# Altium PCB Aux_HV_Board_PCB.PcbDoc
Units mil, origin at the board's own origin, x right, y up, seen from the top; angles counter-clockwise.
Board outline 5000 x 6000 mil, 4 copper layers (Top Layer, Mid-Layer 1, Mid-Layer 2, Bottom Layer), stack 40.247 mil thick; 29 components, 19 nets, 305 pads, 13 vias.
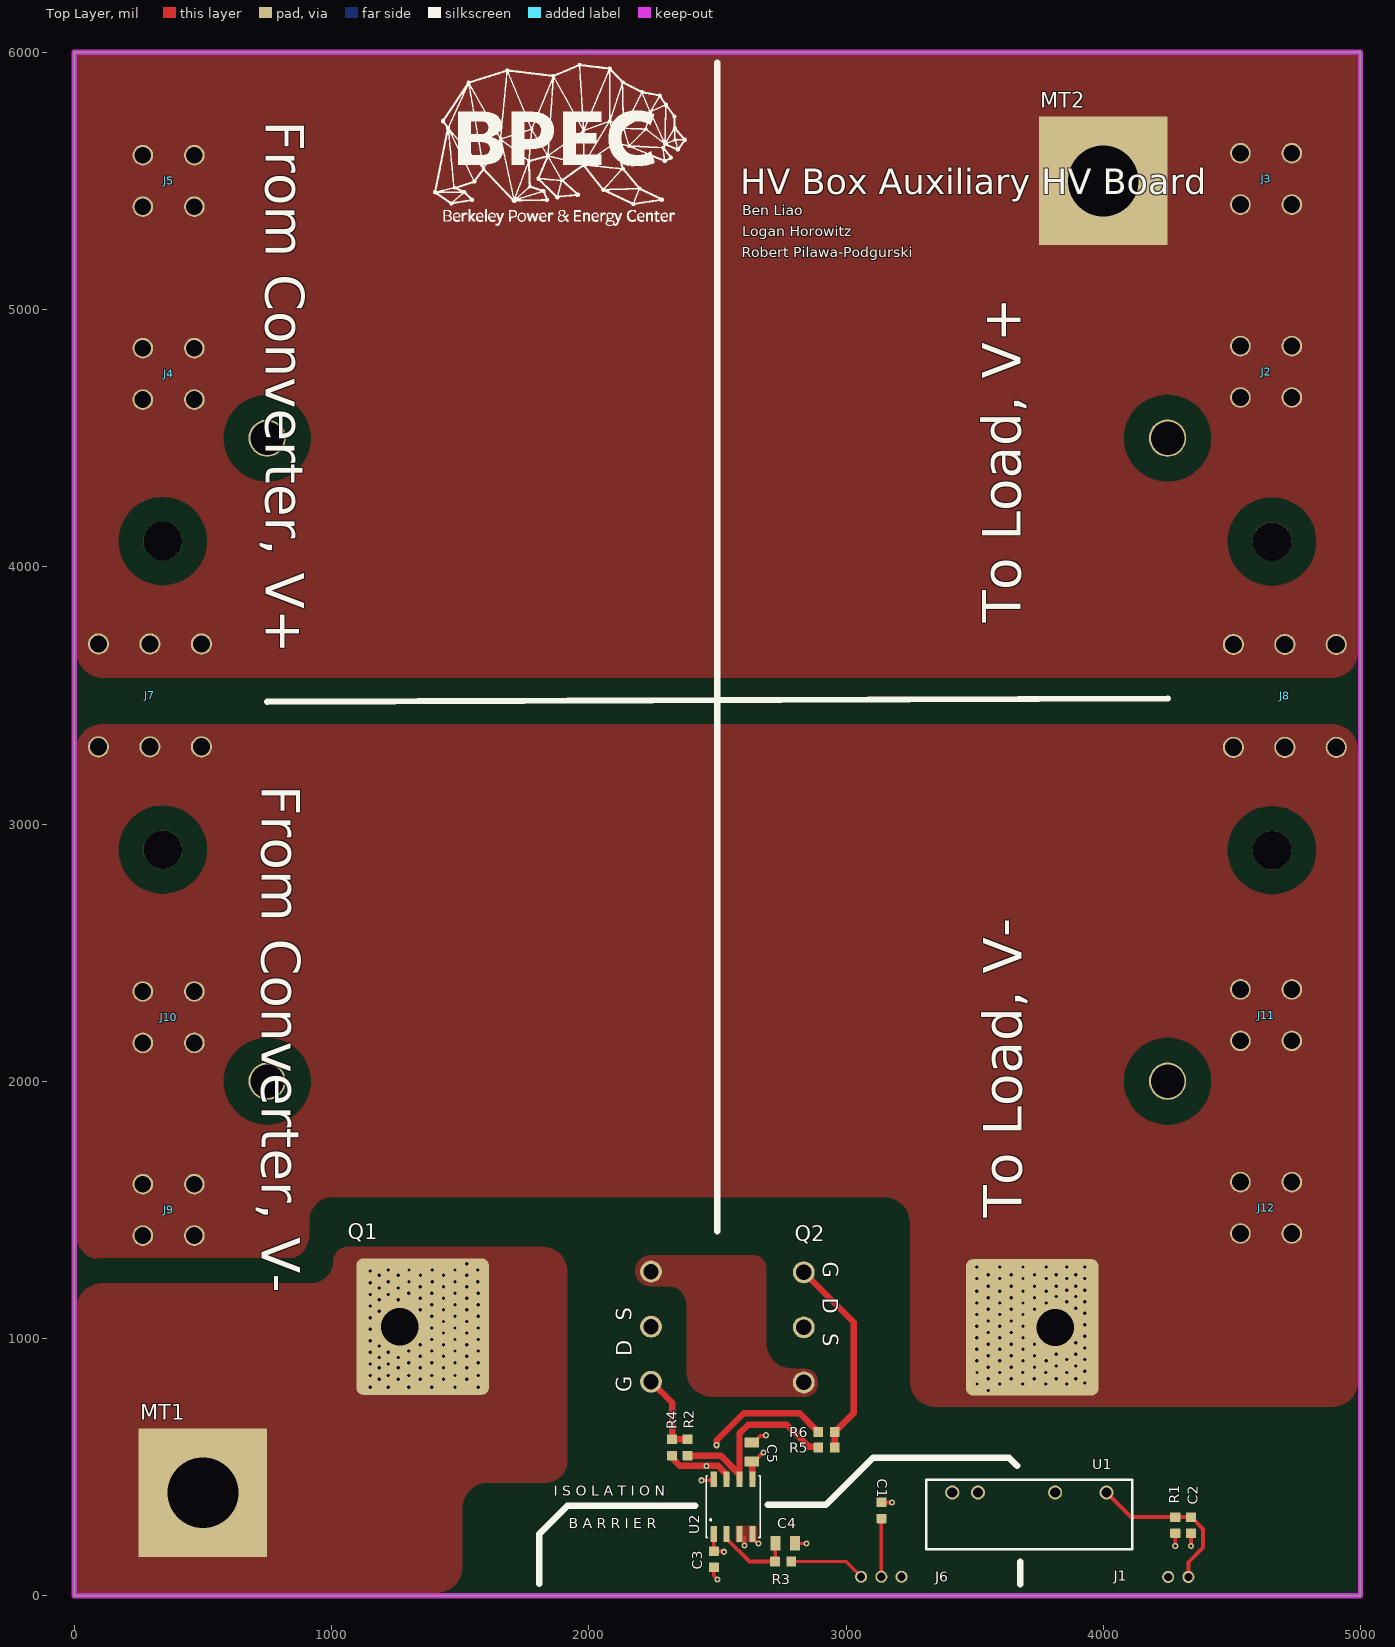
[diagram p0: Top Layer view]
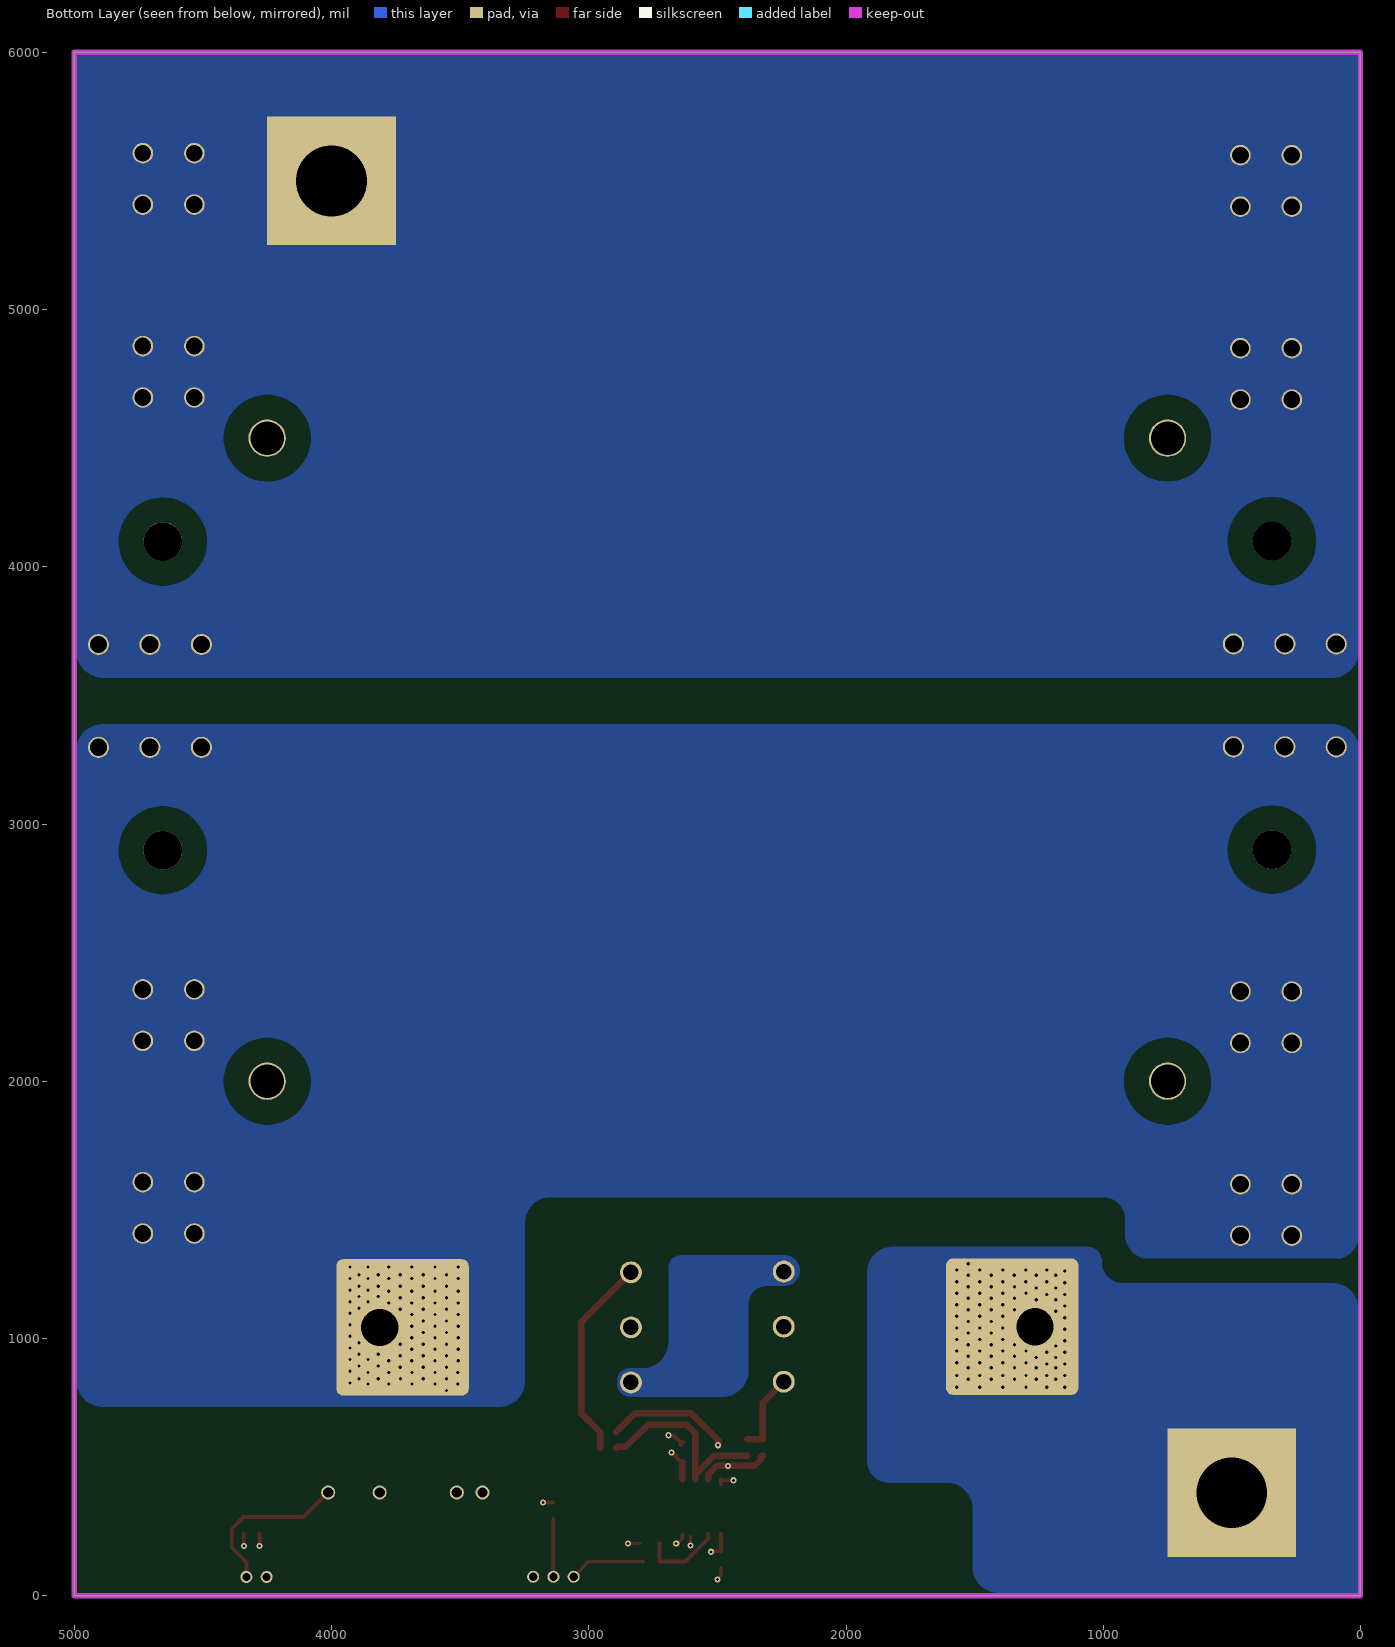
[diagram p1: Bottom Layer view, seen from below]
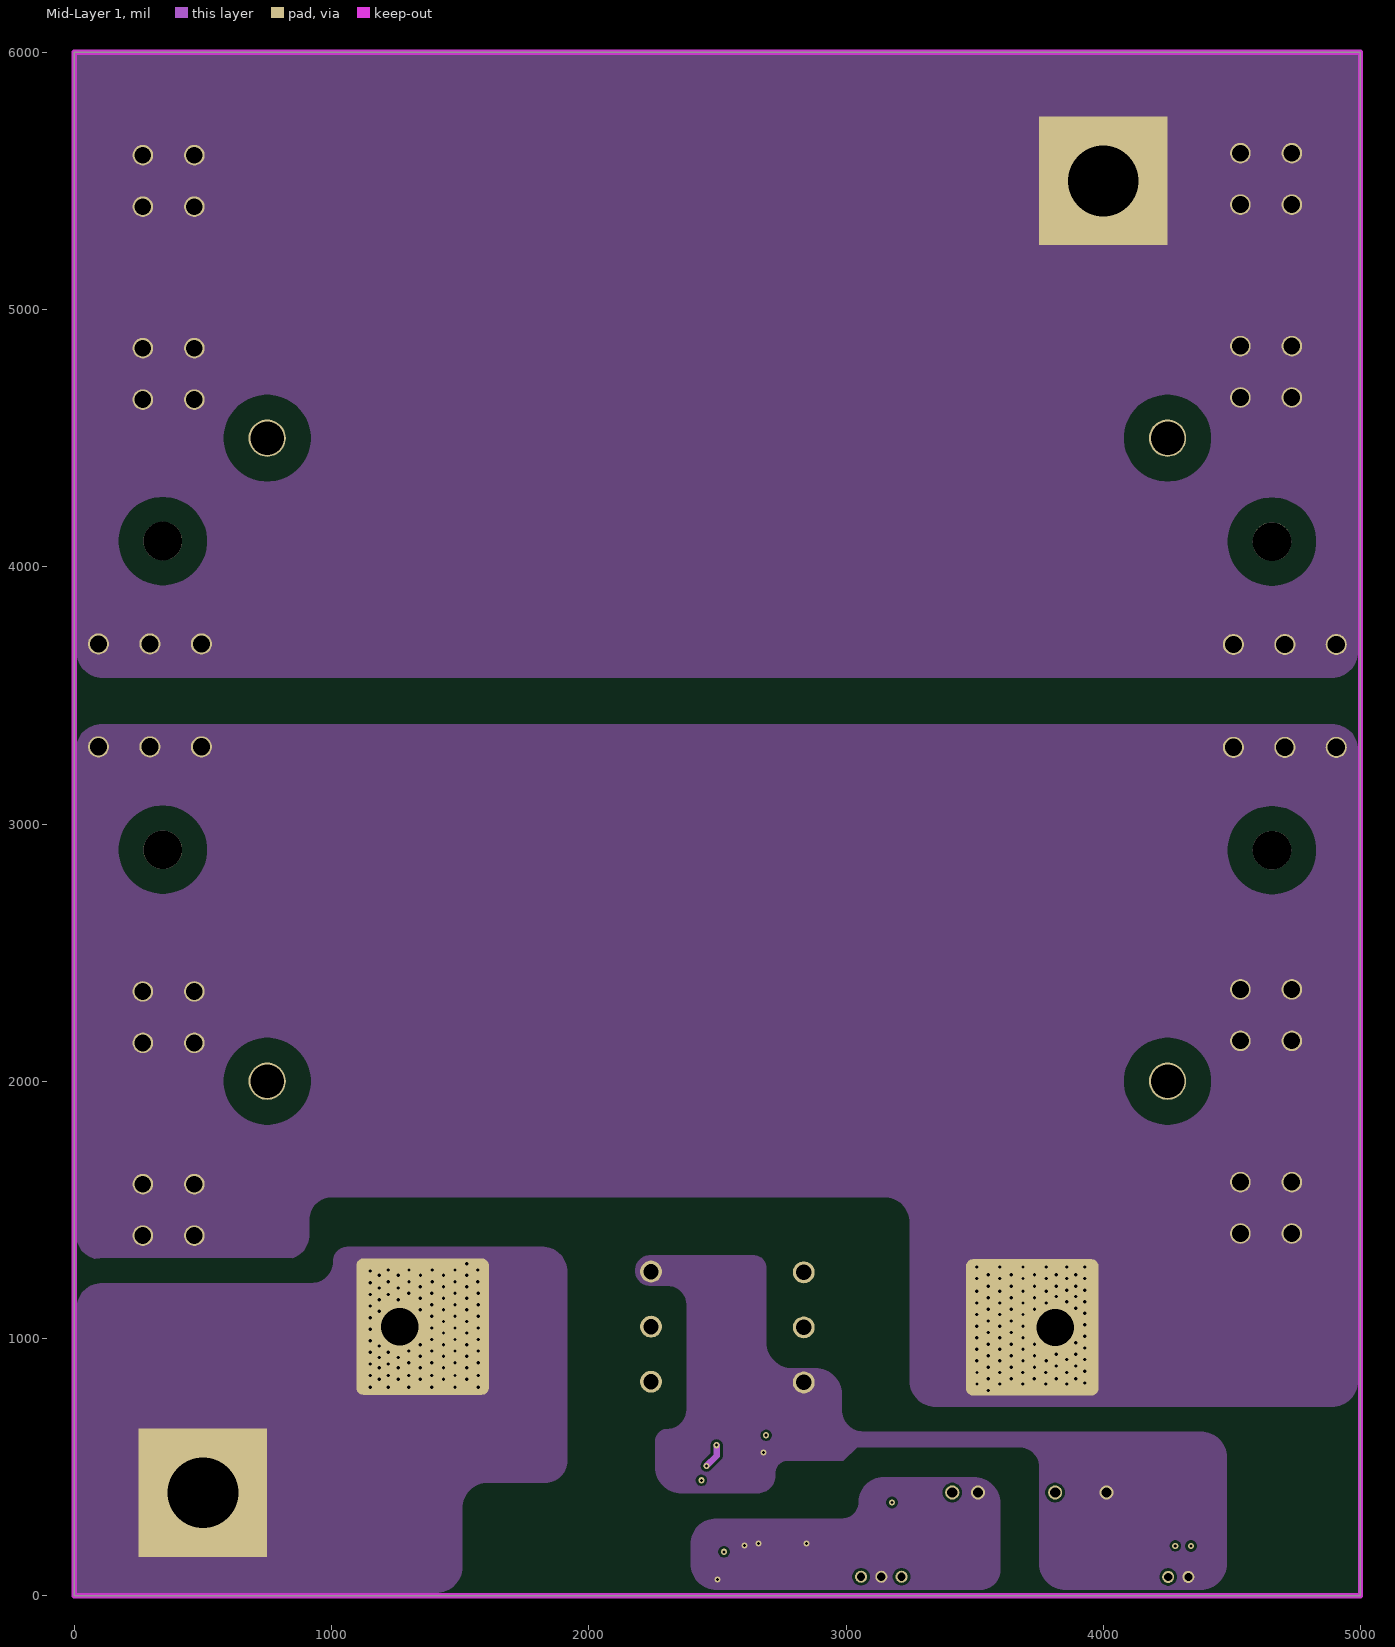
[diagram p2: Mid-Layer 1]
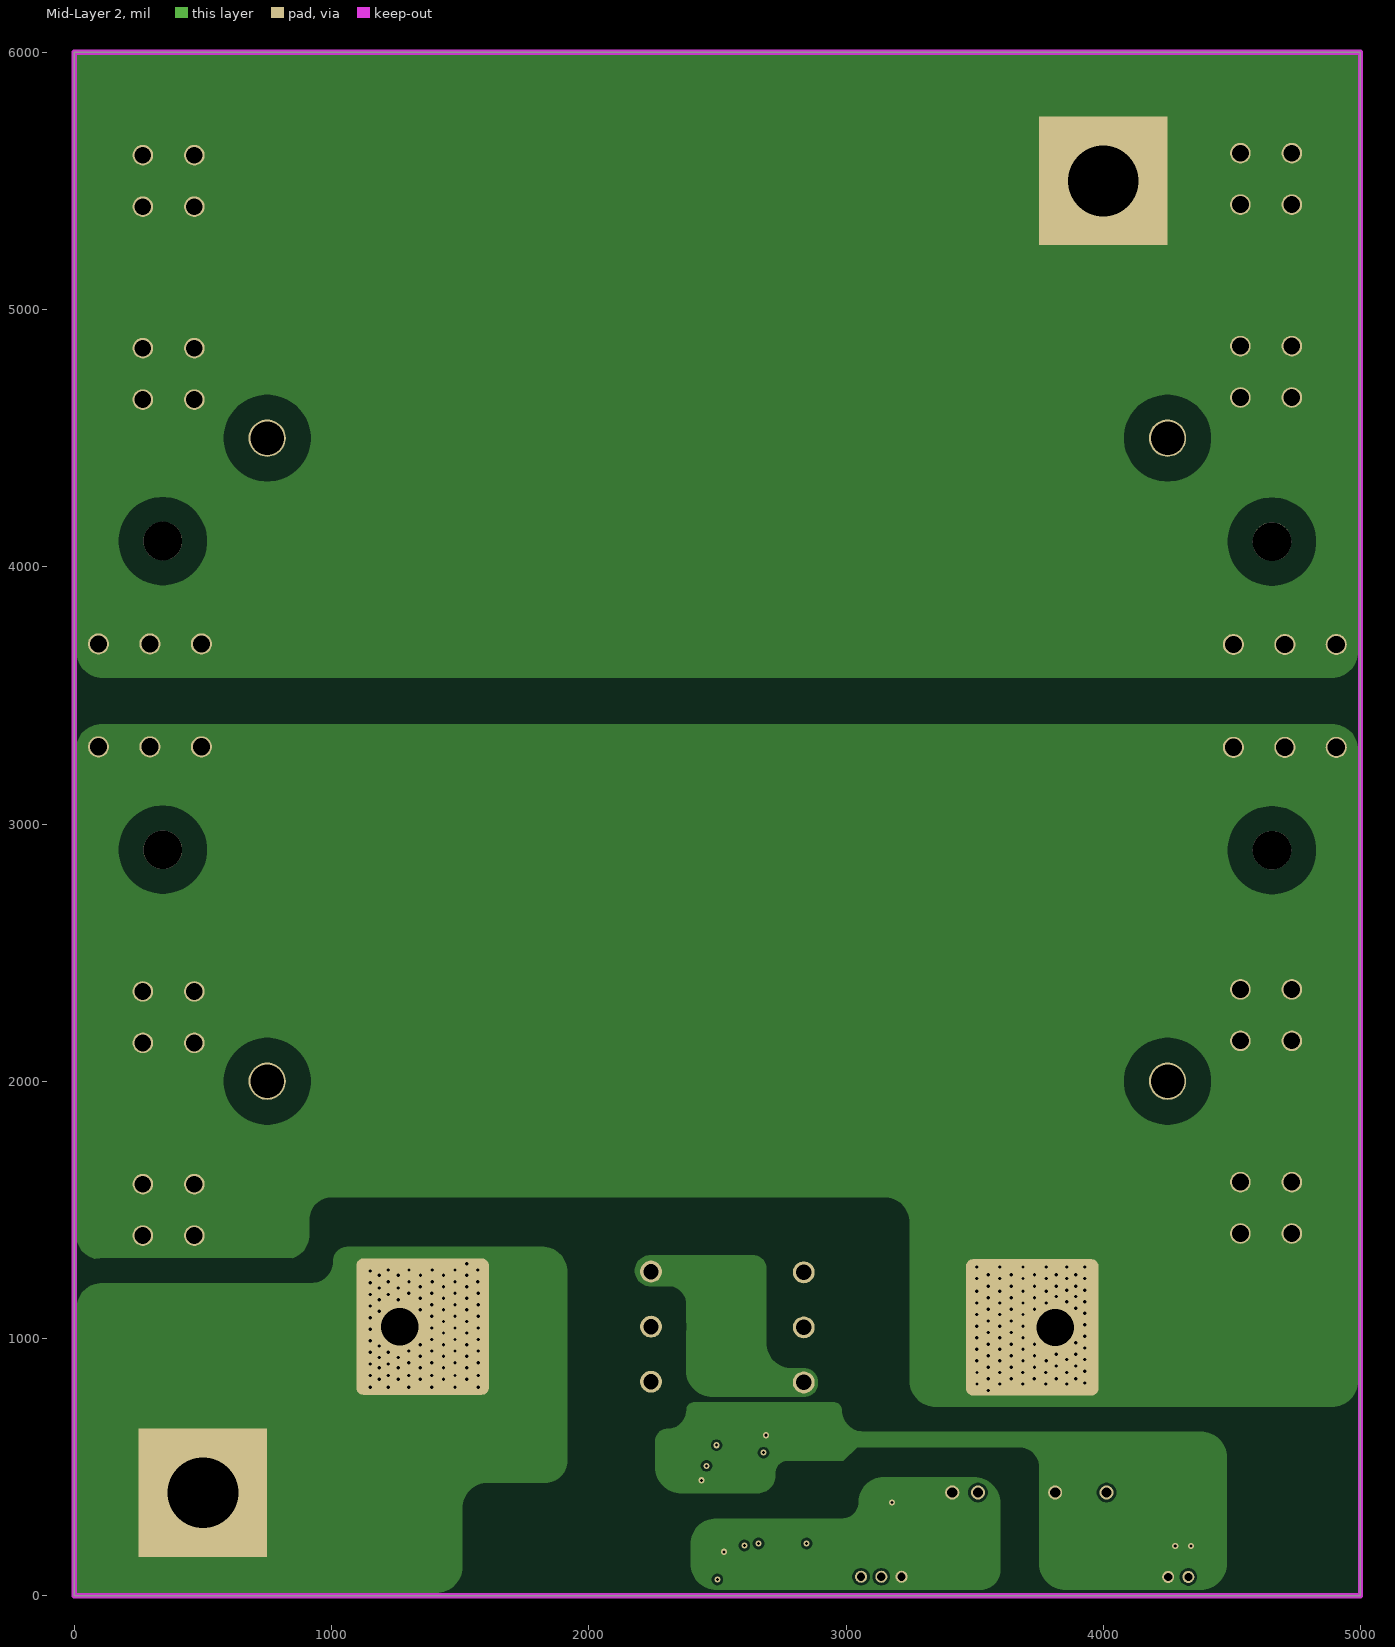
[diagram p3: Mid-Layer 2]
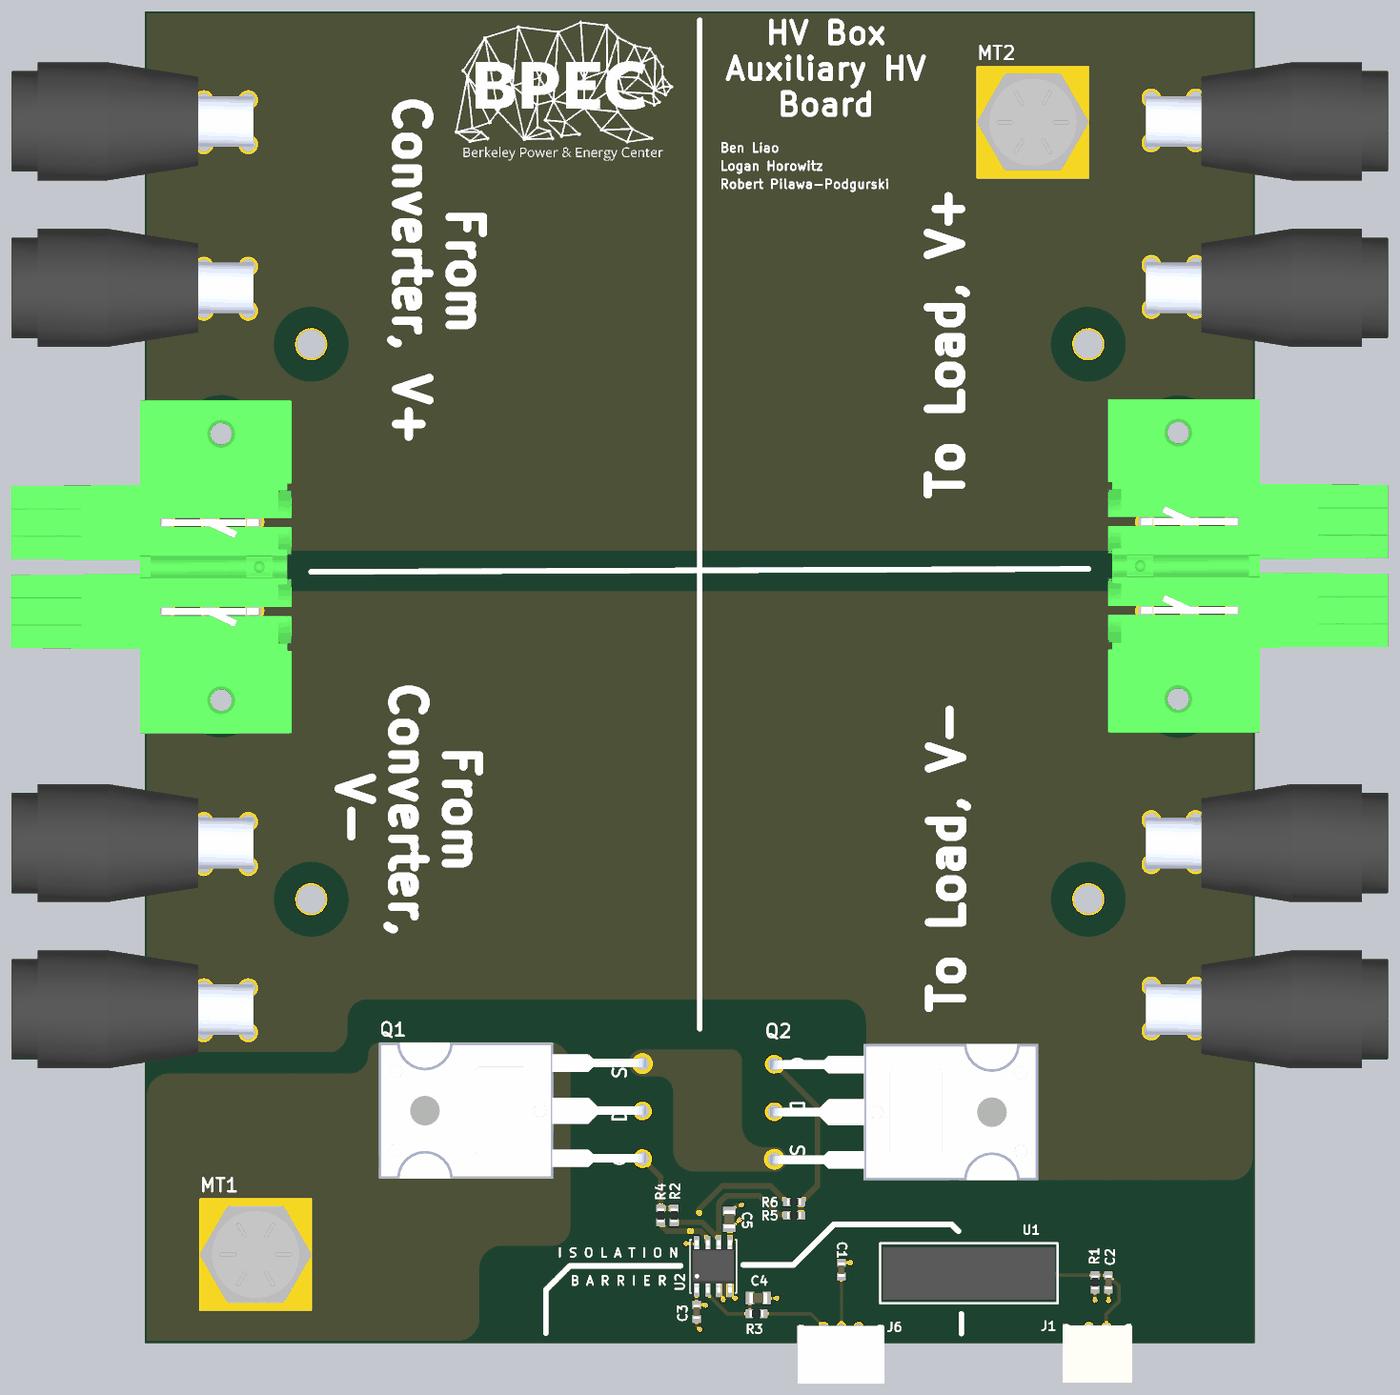
[diagram p4: 3D render of the assembled board from above, using the file's embedded part models]

## Layer stack, top to bottom
Top Solder: solder mask 0.4, Solder Resist, Dk 3.5
Top Layer: signal copper 5.5118
Dielectric 1: dielectric 2.8, FR-4, Dk 4.8
Mid-Layer 1: signal copper 5.5118
Dielectric2: dielectric 12.6, FR-4, Dk 4.8
Mid-Layer 2: signal copper 5.5118
Dielectric3: dielectric 2.8, FR-4, Dk 4.8
Bottom Layer: signal copper 5.5118
Bottom Solder: solder mask 0.4, Solder Resist, Dk 3.5

## Board outline
0,0 5000,0 5000,6000 0,6000

## Design rules (kind name [scope] priority, off if disabled: settings)
BoardOutlineClearance [All] p1: gap=9.84 ignorepadtopadclearanceinfootprint=FALSE
Clearance Clearance_1 [InNetClass('High Voltage') vs OnLayer('Multi-Layer')] p1: gap=96 ignorepadtopadclearanceinfootprint=FALSE
Clearance Clearance_HV [InNetClass('High Voltage') vs InNetClass('High Voltage')] p2: gap=96 ignorepadtopadclearanceinfootprint=FALSE
Clearance Clearance_HV_TO_LV [InNetClass('High Voltage') vs InNetClass('Low Voltage')] p3: gap=96 ignorepadtopadclearanceinfootprint=TRUE
Clearance Clearance_HV_TO_ISO [InNetClass('High Voltage') vs InNetClass('Isolated')] p4: gap=96 ignorepadtopadclearanceinfootprint=TRUE
Clearance Clearance_ISO_TO_LV [InNetClass('Isolated') vs InNetClass('Low Voltage')] p5: gap=96 ignorepadtopadclearanceinfootprint=TRUE
Clearance Clearance_Edge [OnLayer('Keep-Out Layer')] p6: gap=0 ignorepadtopadclearanceinfootprint=FALSE
Clearance [All] p7: gap=10 ignorepadtopadclearanceinfootprint=FALSE except(0: Arc-Hole Track-Hole SMDPad-Hole THPad-Hole Via-Hole Fill-Hole Poly-Hole Region-Hole Text-Hole; 5: Arc-Arc Arc-Track Arc-SMDPad Track-Track Track-SMDPad SMDPad-SMDPad; 5.98: SMDPad-Fill SMDPad-Poly SMDPad-Region; 7.87: Via-Via)
ComponentClearance [All] p1: gap=3.94 collisioncheckmode=3 verticalgap=3.94 showdistances=FALSE
Height [All] p1: minheight=0 maxheight=3000 prefheight=500
HoleSize [All] p1: absolutevalues=TRUE maxlimit=1000 minlimit=7.87 maxpercent=80.000 minpercent=20.000
HoleToHoleClearance [All] p1: gap=19.68 allowstackedmicrovias=TRUE
MinimumAnnularRing [All] p1: minimumring=5.12
MinimumSolderMaskSliver [All] p1 off: minsoldermaskwidth=7.87
PlaneConnect [All] p1: planeconnectstyle=Direct reliefexpansion=20 reliefentries=4 reliefconductorwidth=10 reliefairgap=10
PolygonConnect [All] p1: connectstyle=Direct reliefconductorwidth=39.37 reliefentries=4 polygonreliefangle="90 Angle" airgapwidth=9.84
RoutingVias [All] p1: holewidth=11.81 width=23.62 viastyle="Through Hole" minholewidth=11.81 minwidth=23.62 maxholewidth=248.03 maxwidth=393.7
SolderMaskExpansion [All] p1: expansion=4 istentingtop=FALSE
Width [All] p1: maxlimit=393.7 minlimit=13 preferedwidth=15 minimp=50.000000 maximp=50.000000 favimp=50.000000
24 further rules are at their usual default settings.

## Classes and differential pairs
net class "Low Voltage": +12 GND NetC4_2 PHX1_MT1 PHX1_MT2 PHX2_MT1 PHX2_MT2 V_RES_OUT
net class Isolated: ISO_GND JFET_SOURCE NetQ1_1 NetQ2_1 NetR2_1 NetR4_1
net class "High Voltage": NetMT1_1 Q1_D_Pin Q2_D_Pin RAIL1 RAIL2

## Components (designator, comment, footprint, x,y, rotation, side; value= is the part's Value field where it differs from the comment)
C1 "2.2uF" 0603_CAP 3138,300 r90 top
C2 "2.2uF" 0603_CAP 4341,242.75 r90 top
C3 "100nF" 0603_CAP 2486,109.75 r90 top
C4 "47nF,0805" 0805_CAP 2801,204 r180 top
C5 "10uF" 0805_CAP 2633,596 r270 top
J1 "JST2" JST_2 4331,73 r180 top
J2 "Banana" BANANA_PLUG 4733.35,4858 r180 top
J3 "Banana" BANANA_PLUG 4733.35,5608 r180 top
J4 "Banana" BANANA_PLUG 266.65,4650 r0 top
J5 "Banana" BANANA_PLUG 266.65,5400 r0 top
J6 "JST3" JST_3 3216,73.7 r180 top
J7 "J_Phoenix_76A" PHOENIX_CONNECTOR_76A 294,3500 r270 top
J8 "J_Phoenix_76A" PHOENIX_CONNECTOR_76A 4706,3498 r90 top
J9 "Banana" BANANA_PLUG 266.65,1400 r0 top
J10 "Banana" BANANA_PLUG 266.65,2149 r0 top
J11 "Banana" BANANA_PLUG 4733.35,2357 r180 top
J12 "Banana" BANANA_PLUG 4733.35,1608 r180 top
MT1 "Screw" MOUNT_SMALL 500,400 r0 top
MT2 "Screw" MOUNT_SMALL 4000,5500 r0 top
Q1 "JFET" TO247 2242,832 r90 top
Q2 "JFET" TO247 2836,1257 r270 top
R1 "3.3k" 0603_RES 4280,242.75 r90 top
R2 "51" 0603_RES 2384,544.75 r90 top
R3 "10k" 0603_RES 2787,133 r180 top
R4 "51" 0603_RES 2324,544.75 r90 top
R5 "51" 0603_RES 2893,576 r0 top
R6 "51" 0603_RES 2893,636 r0 top
U1 "U_Power_Isolator" SIP7 3713,401 r180 top
U2 "U_Isolated_Gate_Drive" GATE_DRIVER 2561,346.25 r90 top

## Footprints (in the part's own frame and the unit in brackets; to place one, negate y for a bottom-side part, rotate by r counter-clockwise, add the part's x,y. Pads: shape width x height; smd on the part's side, far side on the other; paste and mask are expansions set on the pad)
0603_CAP [mil] "SMD 0603 Capacitor Footprint"
  rrect10% 37x39 smd: 1(0,0) 2(63,0)
  body extent 0,-15 63,16, height 32
0603_RES [mil] "SMD 0603 Resistor Footprint"
  rrect10% 37x39 smd: 1(0,0) 2(63,0)
  body extent 0,-16 63,16, height 18
0805_CAP [mil] "SMD 0805 Capacitor Footprint"
  rrect10% 39x57 smd: 1(0,0) 2(75,0)
  body extent -2,-25 77,25, height 49
BANANA_PLUG [mil] "Banana Plug Footprint"
  round 80 hole 65: 1(0,200) 1(0,0) 1(200,200) 1(200,0)
  body extent -867,-162 224,370, height 564
GATE_DRIVER [mil] "Isolated Gate Driver Footprint 8-SOIC"
  rrect10% 61x24 smd: 1(-106.5,75) 2(-106.5,25) 3(-106.5,-25) 4(-106.5,-75) 5(106.5,-75) 6(106.5,-25) 7(106.5,25) 8(106.5,75)
  silkscreen extent -120,-105 120,105, body extent -118,-97 118,97, height 69
JST_2 [mil] "2-pin JST Header Footprint, PH series"
  round 47 hole 32: 1(0,0) 2(78.7,0)
  body extent -116,-14 197,252, height 197
JST_3 [mil] "3-pin JST Header Footprint, PH series"
  round 47 hole 32: 1(0,0) 2(78.7,0) 3(157.4,0)
  body extent -115,-10 277,256, height 197
MOUNT_SMALL [mil] "M6/M5 Screw Mount Footprint"
  rect 500x500 hole 275 paste-99999: 1(0,0)
  body extent -251,-219 251,219, height 174
PHOENIX_CONNECTOR_76A [mil] "Jack Phoenix Connector  76 A rated per position 1 kV 2x1 Footprint"
  round 82 hole 67: 1(-200,200) 1(-200,0) 1(-200,-200) 2(200,200) 2(200,0) 2(200,-200)
  round 150 hole 150: 3(-600,50) 4(600,50)
  body extent -746,-894 753,368, height 535
SIP7 [mil] "12 V - 12 V Isolated DC-DC Converter Footprint SIP 7 4 leads"
  round 55 hole 40: 1(-300,0) 3(-100,0) 6(200,0) 7(300,0)
  silkscreen extent -399,-49 401,221, body extent -387,-31 387,205, height 400
TO247 [mil] "TO247 High Power FET Footprint"
  round 85 hole 60: 1(0,0) 2(214,0) 3(428,0)
  round 25 hole 13 paste-99999 mask+4: 4(-21,1092) 4(-21,1022) 4(-21,942) 4(-21,852) 4(-21,762) 4(-21,672) 4(9,1057) 4(9,982) 4(9,897) 4(9,807) 4(9,717) 4(24,1092) 4(24,1022) 4(24,942) 4(24,852) 4(24,762) 4(24,672) 4(54,1057) 4(54,897) 4(54,982) 4(54,807) 4(54,717) 4(69,1092) 4(69,1022) 4(74,852) 4(74,942) 4(74,672) 4(74,762) 4(94,1057) 4(94,982) 4(99,897) 4(99,717) 4(99,807) 4(114,1092) 4(114,1022) 4(119,852) 4(119,942) 4(119,672) 4(119,762) 4(139,1057) 4(144,717) 4(144,807) 4(144,897) 4(159,1092) 4(164,762) 4(164,852) 4(164,672) 4(189,717) 4(189,807) 4(204,1092) 4(209,762) 4(209,852) 4(209,672) 4(234,717) 4(234,807) 4(249,1092) 4(254,762) 4(254,852) 4(254,672) 4(274,1057) 4(279,717) 4(279,807) 4(279,897) 4(294,1092) 4(299,672) 4(299,762) 4(299,852) 4(319,982) 4(319,1057) 4(324,717) 4(324,807) 4(324,897) 4(339,1022) 4(339,1092) 4(344,672) 4(344,762) 4(344,852) 4(344,942) 4(364,982) 4(364,1057) 4(369,717) 4(369,807) 4(369,897) 4(385,1092) 4(389,673) 4(389,762) 4(389,851) 4(389,941) 4(389,1022) 4(414,717) 4(414,807) 4(414,896) 4(414,982) 4(414,1057) 4(430,1092) 4(434,673) 4(434,762) 4(434,851) 4(434,941) 4(434,1022) 4(459,717)
  rrect10% 530x515 hole 145 copper offset 0,-89 paste-99999: 4(214,977)
  rrect10% 530x515 on Top Paste: 6(213,887)
  body extent -91,-16 523,1188, height 197

## Part data
C1 C2: library part C_2.2uF_0603, "Capacitor SMD MLCC 2.2 uF 0603"
C3: library part C_100nF_0603, "Capacitor SMD MLCC 100 nF 0603"
C4: library part C_47nF_0805, "Capacitor SMD MLCC 47 nF 0805, C0G/NP0"
C5: library part C_10uF_0805, "Capacitor SMD MLCC 10 uF 0805"
J1: library part J_JST_2, "Jack JST 2-pin"
J2 J3 J4 J5 J9 J10 J11 J12: library part J_Banana, "Banana Plug"
J6: library part J_JST_3, "Jack JST 3-pin"
J7 J8: "Phoenix Connector, Female, 2 position, 76 A, 1 kV per position"
MT1 MT2: library part MT_Screw_Small, "M5/M6 Screw Mount for connecting board to resistors"
Q1 Q2: library part Q_JFET, "N-Channel JFET1200 V 34 A TO 247-3"
R1: library part R_3300Ohm_0603_1%, "Resistor 3.3 kOhm 0603 1%"
R2 R4 R5 R6: library part R_51Ohm_0603_1%, "Resistor 51 Ohm 0603 1%"
R3: library part R_10kOhm_0603_1%, "Resistor 10 kOhm 0603 1%"
U1: library part U_12_12_Power_Isolator, "12 V -> 12 V DC-DC isolated converter, 84 mW output current, SIP7 4-lead package, 3 kV isolation"
U2: "IC Isolated Gate Drive 3-15 V Output Supply Split Output"

## Free pads (board coordinates)
  round 145 hole 130: 1(750,2000) 1(750,4500) 1(4250,2000) 1(4250,4500)

## Via types
v1: diameter 23.62, hole 11.81, Top Layer to Bottom Layer, 13 vias

## Nets (pads, with @x,y where several pads share a name; then routed paths per layer and width w, separated by ;. In a path a pad name is that pad's centre, name@x,y a point inside that pad or via, vN(x,y) a via of type N, cw(c..) or ccw(c..) an arc to the next point about the centre after c; other vN are vias at no path point)
+12: C1.2 C3.2 J6.1 U1.7 U2.1 | length 148.4
  Top Layer w15: U2.1 C3.2 2523.4,172.75 cw(c2523.4,170.73) v1(2525.42,170.73) ; C1.2 3138.13,362.87 3178.28,362.87 v1(3178.42,362.73) v1@3178.42,363
GND: C1.1 C3.1 C4.1 J6.2 U1.6 U2.3 U2.4 | length 411.8
  Top Layer w13: C3.1 2486,77 v1(2500,63) ; v1(2604.76,195.28) 2604.76,229.76 2605,230 ; U2.4 2636,221.25 2654.25,203 v1(2660,203) ; C4.1 2802,203 v1(2847,203) ; J6.2@3136.6,73 J6.2 3137.65,74.05 3137.65,299.65 C1.1 ; C1.1@3137,300 C1.1@3137.3,299.7
ISO_GND: C2.1 C5.1 J1.2 R1.1 U1.3 U2.8 | length 251.4
  Top Layer w15: v1(2437.77,448.69) 2481.95,448.69 ccw(c2481.95,452.75) U2.8 U2.8@2486,434.25 ; C5.1@2643.33,585.67 C5.1 2642,596 2668.05,622.05 2688.12,622.05 v1(2689.77,623.69) ; R1.1@4279,242.75 R1.1 v1(4280,194) ; v1(4341,193) C2.1
JFET_SOURCE: C2.2 C5.2 J1.1 Q1.3 Q2.3 R1.2 U1.1 U2.5 | length 767.9
  Top Layer w15: C5.2@2636,518 2639,518 2677,556 v1(2679,556) ; U1.1 4108.25,305.75 R1.2 C2.2 4342,305.75 4388,259.75 4388,187 4331,130 J1.1
  Top Layer w25: U2.5 C5.2@2636,518
NetC4_2: C4.2 R3.2 U2.2 | length 314.9
  Top Layer w15: U2.2 2536,221.25 2624.25,133 R3.2 2725,134 2725,203 C4.2
NetMT1_1: MT1.1 Q1.4
NetQ1_1: Q1.1 R2.2 R4.2 | length 318.2
  Top Layer w25: Q1.1 2324,750 R4.2 R2.2
NetQ2_1: Q2.1 R5.2 R6.2 | length 792.6
  Top Layer w25: Q2.1 3030,1063 3030,710 2963,643 2962,643 2956,637 R5.2
NetR2_1: R2.1 R5.1 U2.6 | length 768.6
  Top Layer w25: R2.1 2512.5,544.75 U2.6@2586,471.25 ; U2.6 U2.6@2586,471.25 ; R5.1 2890.03,578.97 2856.03,578.97 2770,665 2620,665 2586,631 U2.6@2586,471.25
NetR4_1: R4.1 R6.1 U2.7 | length 852.6
  Top Layer w25: R4.1 2325,544.75 2331,538.75 2331,528 2354.25,504.75 2458,504.75 2502.5,504.75 2536,471.25 U2.7 ; v1(2497,585) 2497,603.78 2602.22,709 2820,709 2881,648 2882,648 2893,637 R6.1
  Mid-Layer 1 w25: v1(2458,505) 2497,544 v1(2497,585)
PHX1_MT1: J7.3
PHX1_MT2: J7.4
PHX2_MT1: J8.3
PHX2_MT2: J8.4
Q1_D_Pin: Q1.2
Q2_D_Pin: Q2.2
RAIL1: J2.1 J3.1 J4.1 J5.1 J7.1 J8.2 MT2.1
RAIL2: J7.2 J8.1 J9.1 J10.1 J11.1 J12.1 Q2.4
V_RES_OUT: J6.3 R3.1 | length 297.2
  Top Layer w13: R3.1@2787,132 R3.1 2999.3,133 J6.3
pads on no net: Q1.6 Q2.6

## Polygon pours and split planes (outlines as drawn)
RAIL1 on Top Layer "RAIL1_L01_P011" (solid, pour order 11): 11,3842 cw(c11,3843) 10,3843 10,5990 4990,5990 4990,3669 cw(c4890,3669) 4890,3569 110,3569 cw(c110,3669) 10,3669 10,3842
RAIL2 on Top Layer "RAIL2_L01_P010" (solid, pour order 10): 814,1305 ccw(c814,1405) 914,1405 914,1461 cw(c1002,1461) 1002,1549 3149,1549 cw(c3149,1449) 3249,1449 3249,834 ccw(c3349,834) 3349,734 4890,734 ccw(c4890,834) 4990,834 4990,3288 ccw(c4890,3288) 4890,3388 108,3388 ccw(c108,3288) 8,3288 8,1405 ccw(c108,1405) 108,1305 254,1305
NetMT1_1 on Top Layer "NETMT1_1_L01_P009" (solid, pour order 9): 10,11 10,1115 cw(c110,1115) 110,1215 923,1215 ccw(c923,1299) 1007,1299 cw(c1065,1299) 1065,1357 1817,1357 cw(c1817,1257) 1917,1257 1917,524 cw(c1832,524) 1832,439 1608,439 ccw(c1608,339) 1508,339 1508,111 cw(c1408,111) 1408,11
GND on Top Layer "GND_L01_P001" (solid, pour order 1): 2648,272 cw(c2648,265) 2655,265 2655,224 cw(c2638,224) 2638,207 2579,207 cw(c2579,215) 2571,215 2571,266 cw(c2577,266) 2577,272
JFET_SOURCE on Top Layer "JFET_SOURCE_L01_P000" (solid, pour order 0): 2240,1323 ccw(c2240,1263) 2180,1263 ccw(c2240,1263) 2240,1203 2310,1203 cw(c2310,1133) 2380,1133 2380,873 ccw(c2480,873) 2480,773 2840,773 ccw(c2840,823) 2890,823 2890,833 ccw(c2840,833) 2840,883 2790,883 cw(c2790,983) 2690,983 2690,1273 ccw(c2640,1273) 2640,1323
RAIL1 on Mid-Layer 1 "RAIL1_L02_P014" (solid, pour order 14): 10.53,3842.36 cw(c10.53,3843.36) 9.53,3843.36 9.53,5990.36 4989.53,5990.36 4989.53,3669.36 cw(c4889.53,3669.36) 4889.53,3569.36 109.53,3569.36 cw(c109.53,3669.36) 9.53,3669.36 9.53,3842.36
RAIL2 on Mid-Layer 1 "RAIL2_L02_P013" (solid, pour order 13): 813.53,1305.36 ccw(c813.53,1405.36) 913.53,1405.36 913.53,1461.36 cw(c1001.53,1461.36) 1001.53,1549.36 3148.53,1549.36 cw(c3148.53,1449.36) 3248.53,1449.36 3248.53,834.36 ccw(c3348.53,834.36) 3348.53,734.36 4889.53,734.36 ccw(c4889.53,834.36) 4989.53,834.36 4989.53,3288.36 ccw(c4889.53,3288.36) 4889.53,3388.36 107.53,3388.36 ccw(c107.53,3288.36) 7.53,3288.36 7.53,1405.36 ccw(c107.53,1405.36) 107.53,1305.36 253.53,1305.36
JFET_SOURCE on Mid-Layer 1 "JFET_SOURCE_L02_P006" (solid, pour order 6): 2380,864.15 2380,723 cw(c2305,723) 2305,648 ccw(c2305,602) 2259,602 2259,499 ccw(c2359,499) 2359,399 2658,399 ccw(c2658,465) 2724,465 2724,474 cw(c2775,474) 2775,525 2989,524 3043,578 3674,577 cw(c3674,499) 3752,499 3752,124 ccw(c3852,124) 3852,24 4380,24 ccw(c4380,124) 4480,124 4480,538 ccw(c4380,538) 4380,638 3068,638 cw(c3068,723) 2983,723 2983,784 ccw(c2883,784) 2883,884 2844.92,884
GND on Mid-Layer 1 "GND_L02_P002" (solid, pour order 2): 3599,360 ccw(c3499,360) 3499,460 3144,460 ccw(c3144,366) 3050,366 cw(c2984,366) 2984,300 2496,300 ccw(c2496,200) 2396,200 2396,124 ccw(c2496,124) 2496,24 3526,24 ccw(c3526,97) 3599,97 3599,154
NetMT1_1 on Mid-Layer 1 "NETMT1_1_L02_P012" (solid, pour order 12): 9.53,11.36 9.53,1115.36 cw(c109.53,1115.36) 109.53,1215.36 922.53,1215.36 ccw(c922.53,1299.36) 1006.53,1299.36 cw(c1064.53,1299.36) 1064.53,1357.36 1816.53,1357.36 cw(c1816.53,1257.36) 1916.53,1257.36 1916.53,524.36 cw(c1831.53,524.36) 1831.53,439.36 1607.53,439.36 ccw(c1607.53,339.36) 1507.53,339.36 1507.53,111.36 cw(c1407.53,111.36) 1407.53,11.36
JFET_SOURCE on Mid-Layer 1 "JFET_SOURCE_L02_P003" (solid, pour order 3): 2240,1324 ccw(c2240,1264) 2180,1264 ccw(c2240,1264) 2240,1204 2310,1204 cw(c2310,1134) 2380,1134 2380,874 ccw(c2480,874) 2480,774 2840,774 ccw(c2840,824) 2890,824 2890,834 ccw(c2840,834) 2840,884 2790,884 cw(c2790,984) 2690,984 2690,1274 ccw(c2640,1274) 2640,1324
RAIL1 on Mid-Layer 2 "RAIL1_L03_P017" (solid, pour order 17): 10.53,3842.36 cw(c10.53,3843.36) 9.53,3843.36 9.53,5990.36 4989.53,5990.36 4989.53,3669.36 cw(c4889.53,3669.36) 4889.53,3569.36 109.53,3569.36 cw(c109.53,3669.36) 9.53,3669.36 9.53,3842.36
RAIL2 on Mid-Layer 2 "RAIL2_L03_P016" (solid, pour order 16): 813.53,1305.36 ccw(c813.53,1405.36) 913.53,1405.36 913.53,1461.36 cw(c1001.53,1461.36) 1001.53,1549.36 3148.53,1549.36 cw(c3148.53,1449.36) 3248.53,1449.36 3248.53,834.36 ccw(c3348.53,834.36) 3348.53,734.36 4889.53,734.36 ccw(c4889.53,834.36) 4989.53,834.36 4989.53,3288.36 ccw(c4889.53,3288.36) 4889.53,3388.36 107.53,3388.36 ccw(c107.53,3288.36) 7.53,3288.36 7.53,1405.36 ccw(c107.53,1405.36) 107.53,1305.36 253.53,1305.36
ISO_GND on Mid-Layer 2 "ISO_GND_L03_P008" (solid, pour order 8): 2259,499 ccw(c2359,499) 2359,399 2658,399 ccw(c2658,465) 2724,465 2724,474 cw(c2775,474) 2775,525 2989,524 3043,578 3044,577 3673,577 cw(c3673,498) 3752,498 3752,124 ccw(c3852,124) 3852,24 4380,24 ccw(c4380,124) 4480,124 4480,538 ccw(c4380,538) 4380,638 3067,638 cw(c3067,722) 2983,722 ccw(c2953,722) 2953,752 2410,752 ccw(c2410,722) 2380,722 cw(c2307,722) 2307,649 2306,649 ccw(c2306,602) 2259,602
+12 on Mid-Layer 2 "+12_L03_P007" (solid, pour order 7): 3599,360 ccw(c3499,360) 3499,460 3144,460 ccw(c3144,366) 3050,366 cw(c2984,366) 2984,300 2496,300 ccw(c2496,200) 2396,200 2396,124 ccw(c2496,124) 2496,24 3526,24 ccw(c3526,97) 3599,97 3599,154
NetMT1_1 on Mid-Layer 2 "NETMT1_1_L03_P015" (solid, pour order 15): 9.53,11.36 9.53,1115.36 cw(c109.53,1115.36) 109.53,1215.36 922.53,1215.36 ccw(c922.53,1299.36) 1006.53,1299.36 cw(c1064.53,1299.36) 1064.53,1357.36 1816.53,1357.36 cw(c1816.53,1257.36) 1916.53,1257.36 1916.53,524.36 cw(c1831.53,524.36) 1831.53,439.36 1607.53,439.36 ccw(c1607.53,339.36) 1507.53,339.36 1507.53,111.36 cw(c1407.53,111.36) 1407.53,11.36
JFET_SOURCE on Mid-Layer 2 "JFET_SOURCE_L03_P004" (solid, pour order 4): 2239.5,1323.5 ccw(c2239.5,1263.5) 2179.5,1263.5 ccw(c2239.5,1263.5) 2239.5,1203.5 2309.5,1203.5 cw(c2309.5,1133.5) 2379.5,1133.5 2379.5,873.5 ccw(c2479.5,873.5) 2479.5,773.5 2839.5,773.5 ccw(c2839.5,823.5) 2889.5,823.5 2889.5,833.5 ccw(c2839.5,833.5) 2839.5,883.5 2789.5,883.5 cw(c2789.5,983.5) 2689.5,983.5 2689.5,1273.5 ccw(c2639.5,1273.5) 2639.5,1323.5
RAIL1 on Bottom Layer "RAIL1_L04_P020" (solid, pour order 20): 10.53,3842.36 cw(c10.53,3843.36) 9.53,3843.36 9.53,5990.36 4989.53,5990.36 4989.53,3669.36 cw(c4889.53,3669.36) 4889.53,3569.36 109.53,3569.36 cw(c109.53,3669.36) 9.53,3669.36 9.53,3842.36
RAIL2 on Bottom Layer "RAIL2_L04_P019" (solid, pour order 19): 813.53,1305.36 ccw(c813.53,1405.36) 913.53,1405.36 913.53,1461.36 cw(c1001.53,1461.36) 1001.53,1549.36 3148.53,1549.36 cw(c3148.53,1449.36) 3248.53,1449.36 3248.53,834.36 ccw(c3348.53,834.36) 3348.53,734.36 4889.53,734.36 ccw(c4889.53,834.36) 4989.53,834.36 4989.53,3288.36 ccw(c4889.53,3288.36) 4889.53,3388.36 107.53,3388.36 ccw(c107.53,3288.36) 7.53,3288.36 7.53,1405.36 ccw(c107.53,1405.36) 107.53,1305.36 253.53,1305.36
NetMT1_1 on Bottom Layer "NETMT1_1_L04_P018" (solid, pour order 18): 9.53,11.36 9.53,1115.36 cw(c109.53,1115.36) 109.53,1215.36 922.53,1215.36 ccw(c922.53,1299.36) 1006.53,1299.36 cw(c1064.53,1299.36) 1064.53,1357.36 1816.53,1357.36 cw(c1816.53,1257.36) 1916.53,1257.36 1916.53,524.36 cw(c1831.53,524.36) 1831.53,439.36 1607.53,439.36 ccw(c1607.53,339.36) 1507.53,339.36 1507.53,111.36 cw(c1407.53,111.36) 1407.53,11.36
JFET_SOURCE on Bottom Layer "JFET_SOURCE_L04_P005" (solid, pour order 5): 2240,1324 ccw(c2240,1264) 2180,1264 ccw(c2240,1264) 2240,1204 2310,1204 cw(c2310,1134) 2380,1134 2380,874 ccw(c2480,874) 2480,774 2840,774 ccw(c2840,824) 2890,824 2890,834 ccw(c2840,834) 2840,884 2790,884 cw(c2790,984) 2690,984 2690,1274 ccw(c2640,1274) 2640,1324

## Keep-outs
Keep-Out Layer:
  the board outline again, w20

## Silkscreen, mask and mechanical layers (free items; w line width, h text height)
Top Overlay:
  drawing of 38 lines, arcs and shapes, not listed
  text "From Converter, V+" at 745,5733.37 h150 r270
  text "HV Box Auxiliary HV Board" at 2588.5,5448 h100
  text "Ben Liao" at 2596.42,5366 h40
  text "Logan Horowitz" at 2596.42,5284.16 h40
  text "Robert Pilawa-Podgurski" at 2595.43,5202.33 h40
  text "To Load, V+" at 3679.02,3783 h150 r90
  text "From Converter, V-" at 728,3151.5 h150 r270
  text "To Load, V-" at 3684.02,1470 h150 r90
  text "I S O L A T I O N" at 1864.77,389.01 h40
  text "B A R R I E R" at 1922.19,263.01 h40

## Text inside footprints (layer, text, board x,y; h text height)
Q1: Top Overlay "G   D   S" at 2168,790 h60 r90
Q2: Top Overlay "G   D   S" at 2910,1299 h60 r270